# Allegro board GSM_Module_REV3.0.brd
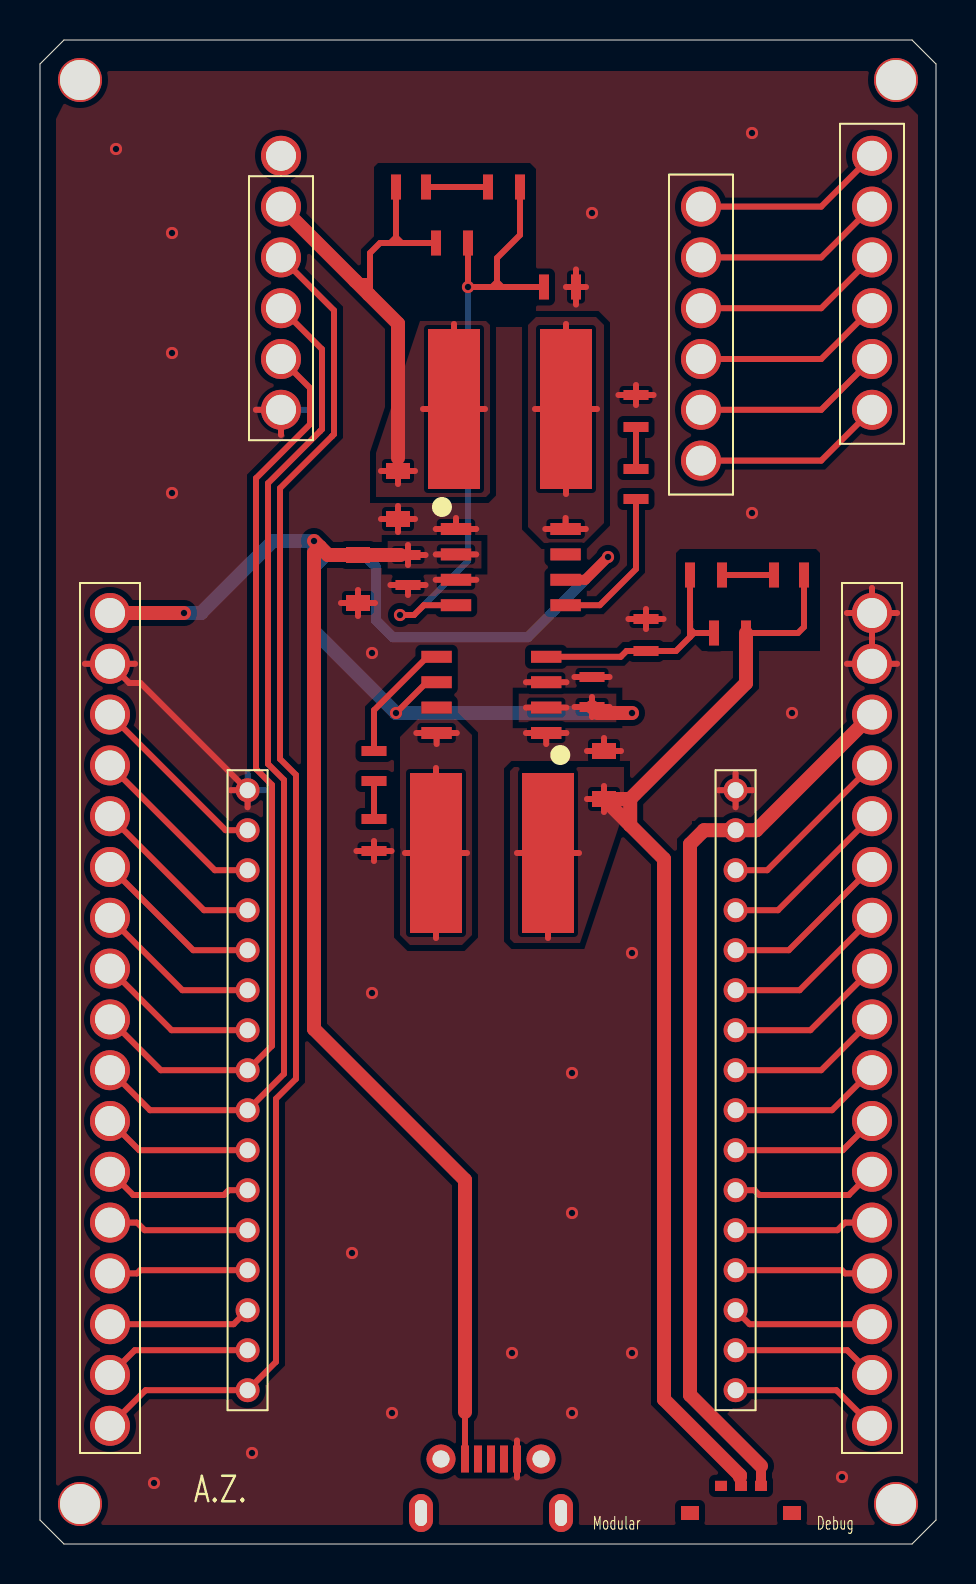
[diagram p0: board, top side]
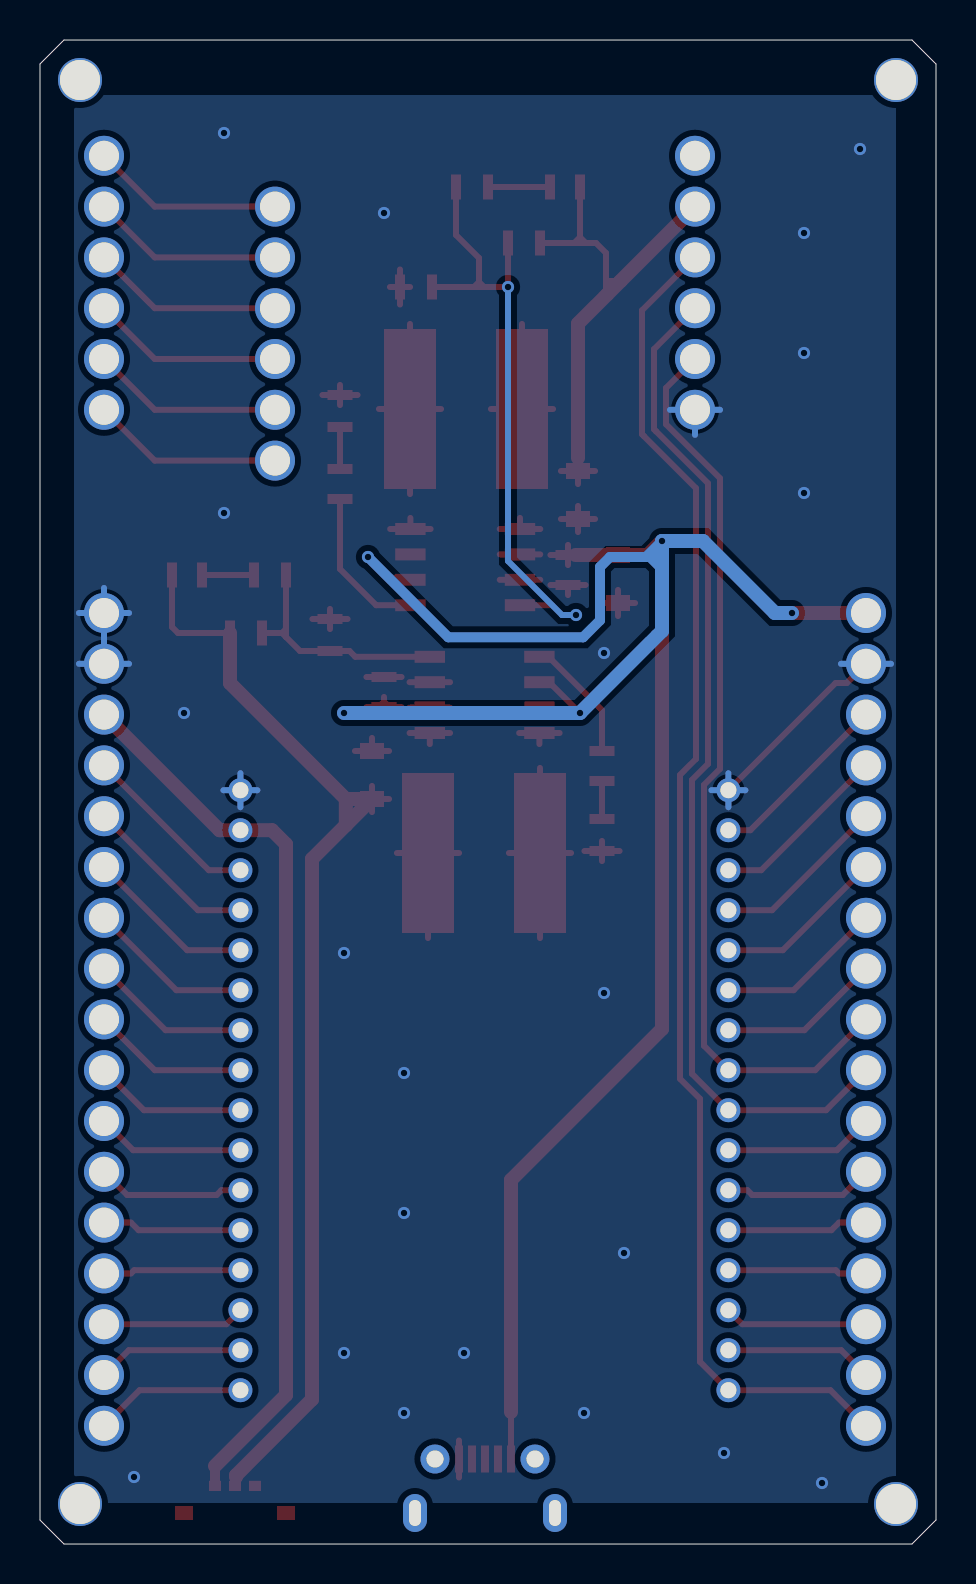
[diagram p1: board, bottom side, seen from below]

Outline 44.8 x 75.2 mm; copper layers: TOP, BOTTOM. Coordinates in mm from the lower left corner of the outline.
Outline path: 0,74 1.2,75.2 43.6,75.2 44.8,74 44.8,1.2 43.6,0 1.2,0 0,1.2 0,74

## Design rules (mm)
constraint set DEFAULT: min track width 0.3

## Placement (name value [footprint] x y rotation side)
1  HEADER  [HEADER17]  3.5 46.55 270 top
CBY1  0.01 uF  [C_0805]  26.1 43.35 270 top
CBY2  0.01 uF  [C_0805]  19.9 47.95 90 top
CC1  12 nF  [C_0805]  18.2 38.15 90 top
CC2  9 nF  [C_0805]  28.3 53.75 270 top
CF1  430 pF  [C_0805]  38.2 49.95 180 top
CF2  430 pF  [C_0805]  17.8 66.35 0 top
CIN  22 uF  [C_3216]  15.9 47.05 90 top
COUT1  44 uF  [C_3216]  28.2 39.65 270 top
COUT2  44 uF  [C_3216]  17.9 51.25 90 top
L1  3.6 uH  [L_8040]  19.8 34.55 0 top
L2  3.6 uH  [L_8040]  26.3 56.75 180 top
NOREF  -  [unnamed]  42.8 2 0 top
NOREF#2  -  [unnamed]  42.8 73.2 0 top
NOREF#3  -  [unnamed]  2 73.2 0 top
NOREF#4  -  [unnamed]  2 2 0 top
R1  24.31 K  [R_0805]  33.7 45.55 0 top
R2  7.78 K  [R_0805]  30.3 46.25 270 top
R3  31.12 K  [R_0805]  21.4 65.05 180 top
R4  7.78 K  [R_0805]  26.8 62.85 180 top
RC1  18.7 K  [R_0805]  16.7 34.65 90 top
RC2  143 K  [R_0805]  29.8 57.45 270 top
RF1  1K  [R_0805]  34.1 48.45 180 top
RF2  1K  [R_0805]  22.4 67.85 0 top
S1  -  [SWITCH]  32.5 1.55 0 top
U6  NCP3170  [SOIC8_FOOTPRINT]  19.81 40.55 90 top
U9  NCP3170  [SOIC8_FOOTPRINT]  26.3 50.75 270 top
U11  ONION  [OMEGA2_FOOTPRINT]  34.78 -1.71 270 top
U15  SIM800L  [SIM800_COREBOARD_FOOTPRINT]  33.05 66.87 270 top
U16  HEADER  [HEADER6]  41.6 69.41 270 top
U17  HEADER  [HEADER17]  41.6 46.55 270 top
U18  USB  [MICRO_USB]  19.05 1.55 0 top

## Library data of the parts
1 = BUS_17_PIN_L
CBY1 CBY2 CC1 CC2 CF1 CF2 CIN COUT1 COUT2 = C
L1 L2 = L
R1-R4 RC1 RC2 RF1 RF2 = R
S1 = SWITCH
U6 U9 = NCP3170_0
U11 = ONION
U15 = SIM800L
U16 = BUS_6_PIN_R
U17 = BUS_17_PIN_R
U18 = USB_5_PIN_0

## Footprints (pads in the part's own frame, mm; a bottom-side part is the same pattern mirrored in y, then rotated)
C_0805
  rect 0.5x1.25 smd: 1(0,1.5) 2(1.5,1.5)
C_3216
  rect 0.8x1.2 smd: 1(0,0) 2(2.4,0)
HEADER6
  round 2 hole 1.5: 1(0,0) 2(2.54,0) 3(5.08,0) 4(7.62,0) 5(10.16,0) 6(12.7,0)
HEADER17
  round 2 hole 1.5: 1(0,0) 2(2.54,0) 3(5.08,0) 4(7.62,0) 5(10.16,0) 6(12.7,0) 7(15.24,0) 8(17.78,0) 9(20.32,0) 10(22.86,0) 11(25.4,0) 12(27.94,0) 13(30.48,0) 14(33.02,0) 15(35.56,0) 16(38.1,0) 17(40.64,0)
L_8040
  rect 2.6x8 smd: 1(0,0) 2(5.6,0)
MICRO_USB
  rect 0.4x1.35 smd: 1(2.2,2.7) 2(2.85,2.7) 3(3.5,2.7) 4(4.15,2.7) 5(4.8,2.7)
  round 1.45 hole 0.85: 6(1,2.7) 7(6,2.7)
  oval 1.2x1.9 hole 0.6x1.3: 8(0,0) 9(7,0)
OMEGA2_FOOTPRINT
  round 1.2 hole 0.8: 1(-39.4,-24.4) 2(-37.4,-24.4) 3(-35.4,-24.4) 4(-33.4,-24.4) 5(-31.4,-24.4) 6(-29.4,-24.4) 7(-27.4,-24.4) 8(-25.4,-24.4) 9(-23.4,-24.4) 10(-21.4,-24.4) 11(-19.4,-24.4) 12(-17.4,-24.4) 13(-15.4,-24.4) 14(-13.4,-24.4) 15(-11.4,-24.4) 16(-9.4,-24.4) 17(-39.4,0) 18(-37.4,0) 19(-35.4,0) 20(-33.4,0) 21(-31.4,0) 22(-29.4,0) 23(-27.4,0) 24(-25.4,0) 25(-23.4,0) 26(-21.4,0) 27(-19.4,0) 28(-17.4,0) 29(-15.4,0) 30(-13.4,0) 31(-11.4,0) 32(-9.4,0)
R_0805
  rect 0.5x1.25 smd: 1(0,0) 2(1.6,0)
SIM800_COREBOARD_FOOTPRINT
  round 2 hole 1.5: 1(0,0) 2(2.54,0) 3(5.08,0) 4(7.62,0) 5(10.16,0) 6(12.7,0) 7(0,-21) 8(2.54,-21) 9(5.08,-21) 10(7.62,-21) 11(10.16,-21) 12(-2.54,-21)
SOIC8_FOOTPRINT
  rect 0.6x1.52 smd: 1(0,-5.5) 2(1.27,-5.5) 3(2.54,-5.5) 4(3.81,-5.5) 5(0,-0.02) 6(1.27,-0.02) 7(2.54,-0.02) 8(3.81,-0.02)
SWITCH
  rect 0.6x0.51 smd: 1(1.55,1.355) 2(2.55,1.355) 3(3.55,1.355)
  rect 0.9x0.7 smd: 4(0,0) 5(5.1,0)
unnamed
  round 2.2 hole 2: 1(0,0)

## Nets
VDD_ONION: S1.3(VDD3.3V) U11.18 U17.3(VDD3.3)
0: 1.2 CBY1.1 CBY2.1 CIN.1 COUT1.1 COUT2.1 R2.1 R4.1 RC1.1 RC2.1 U6.1 U6.3 U9.1 U9.3 U11.1 U11.17 U15.11 U17.1 U17.2 U18.5
N00605: 1.1(VDD5) CBY1.2 CBY2.2 CIN.2 U6.2 U6.7 U9.2 U9.7 U18.1(VDD5)
N00624: U11.19 U17.4
N00636: U11.20 U17.5
N00648: U11.21 U17.6
N00660: U11.22 U17.7
N00672: U11.23(WDT_R_G38) U17.8
N00684: U11.24 U17.9
N00696: U11.25 U17.10
N00708: U11.26 U17.11
N00720: U11.27 U17.12
N00732: U11.28 U17.13
N00744: U11.29 U17.14
N00756: U11.30 U17.15
N00772: U11.31 U17.16
N00784: U11.32 U17.17
N01017: 1.4 U11.3
N01019: 1.5 U11.4
N01021: 1.6 U11.5
N01023: 1.7 U11.6
N01025: 1.8 U11.7
N01027: 1.9 U11.8 U15.10
N01029: 1.10 U11.9 U15.9
N01031: 1.11 U11.10
N01033: 1.12 U11.11
N01035: 1.13 U11.12
N01037: 1.14 U11.13
N01039: 1.15 U11.14
N01041: 1.16 U11.15
N01043: 1.17 U11.16 U15.8
N02446: 1.3 U11.2
N05374: CF1.1 COUT1.2 L1.2 R1.2 S1.2
N05658: R1.1 R2.2 RF1.2 U6.4
N07946: CF2.1 COUT2.2 L2.2 R3.2 U15.7(VCC)
N17197: R3.1 R4.2 RF2.2 U9.4
N18925: CF1.2 RF1.1
N19734: CC1.2 U6.8
N37284: L2.1 U9.5(VSW)
N038044: L1.1 U6.5(VSW)
N047600: CC1.1 RC1.2
N081480: CC2.1 RC2.2
N081481: CC2.2 U9.8
N184661: CF2.2 RF2.1
N261676: U15.1 U16.1
N261677: U15.2 U16.2
N261678: U15.3 U16.3
N261679: U15.4 U16.4
N2616710: U15.5 U16.5(SPKP)
N2616711: U15.6 U16.6

Pads without a net: NOREF 1; NOREF#2 1; NOREF#3 1; NOREF#4 1; S1 1 4 5; U6 6; U9 6; U15 12; U18 2 3 4 6 7 8 9

## Via types
v1: diameter 0.61, hole 0.33, TOP to BOTTOM, 28 vias

## Routing (per net, layer and track width the routed paths; a pad name or vN(x,y) marks a point on that pad's centre or on a via; arc(x,y) is an arc through that point)
VDD_ONION: length 45.3
  TOP w0.5: 36.05,3.9 S1.3
  TOP w0.7: U17.3 35.82,35.69 U11.18 33.2,35.69 32.5,34.99 32.5,7.45 36.05,3.9
0: length 84.6
  TOP w0.3: COUT2.1 18.75,51.25 ; COUT2.1 17.9,50.6 ; COUT2.1 17.05,51.25 ; COUT2.1 17.9,51.9 ; 23.85,3.32 U18.5 23.85,5.18 ; 29.8,56.95 RC2.1 ; RC2.1 30.68,57.45 ; RC2.1 28.92,57.45 ; RC2.1 29.8,57.95 ; R4.1 27.3,62.85 ; R4.1 26.8,63.73 ; R4.1 26.3,62.85 ; R4.1 26.8,61.97 ; 15.05,47.05 CIN.1 ; CIN.1 15.9,47.7 ; CIN.1 15.9,46.4 ; CIN.1 16.75,47.05 ; 40.35,44.01 U17.2 ; U17.2 41.6,45.26 ; U17.2 42.85,44.01 ; 26.72,43.35 CBY1.1 28.48,43.35 ; U11.17 35.63,37.69 ; U11.17 34.78,38.54 ; U11.17 34.78,36.84 ; U11.17 33.93,37.69 ; 1.2 4.46,43.05 5.02,43.05 U11.1 ; 1.2 4.75,44.01 ; 1.2 2.25,44.01 ; 19.79,50.75 U9.1 ; U9.1 21.81,50.75 ; U9.1 20.8,51.3 ; 9.53,37.69 U11.1 ; U11.1 10.38,36.84 ; COUT1.1 29.05,39.65 ; COUT1.1 28.2,40.3 ; COUT1.1 27.35,39.65 ; U6.1 26.32,40.55 ; U6.1 25.31,40 ; U6.1 24.3,40.55 ; 29.42,46.25 R2.1 ; R2.1 30.3,46.75 ; R2.1 31.18,46.25 ; R2.1 30.3,45.75 ; 17.52,47.95 CBY2.1 ; CBY2.1 19.28,47.95 ; CBY2.1 18.4,47.45 ; 21.81,48.21 U9.3 19.79,48.21 ; 10.8,56.71 U15.11 12.05,55.46 ; U17.1 41.6,47.8 ; U17.1 42.85,46.55 ; U17.1 40.35,46.55 ; U17.1 41.6,45.3 ; 15.82,34.65 RC1.1 ; RC1.1 17.58,34.65 ; RC1.1 16.7,34.15 ; RC1.1 16.7,35.15 ; 24.3,43.09 U6.3 26.32,43.09
  BOTTOM w0.3: 4.75,44.01 1.2 2.25,44.01 ; U17.2 42.85,44.01 ; U17.2 41.6,45.26 ; U17.2 40.35,44.01 ; U17.1 41.6,47.8 ; U17.1 41.6,45.3 ; U17.1 42.85,46.55 ; U17.1 40.35,46.55 ; U15.11 13.3,56.71 ; U15.11 10.8,56.71 ; U15.11 12.05,55.46 ; 33.93,37.69 U11.17 ; U11.17 35.63,37.69 ; U11.17 34.78,36.84 ; U11.17 34.78,38.54 ; U11.1 10.38,38.54 ; U11.1 9.53,37.69 ; U11.1 10.38,36.84 ; U11.1 11.23,37.69
  vias: v1(3.8,69.75) v1(5.7,3.05) v1(6.6,65.55) v1(6.6,59.55) v1(6.6,52.55) v1(10.6,4.55) v1(15.6,14.55) v1(16.6,44.55) v1(16.6,27.55) v1(17.6,6.55) v1(23.6,9.55) v1(26.6,23.55) v1(26.6,16.55) v1(26.6,6.55) v1(27.6,66.55) v1(29.6,29.55) v1(29.6,9.55) v1(35.6,70.55) v1(35.6,51.55) v1(37.6,41.55) v1(40.1,3.35)
N00605: length 124.7
  TOP w0.3: CBY2.2 18.4,49.95 ; CBY2.2 19.28,49.45 ; CBY2.2 18.02,49.45 ; CBY2.2 18.4,48.95 ; 24.3,41.82 U6.2 26.32,41.82 ; v1(17.8,41.55) 19.34,43.09 U6.7 ; 21.81,49.48 U9.2 19.79,49.48 ; CBY1.2 27.6,42.35 ; CBY1.2 28.48,41.85 ; CBY1.2 27.6,41.35 ; CBY1.2 26.72,41.85 ; 21.25,6.6 U18.1
  TOP w0.5: U9.7 27.26,48.21 v1(28.4,49.35)
  TOP w0.7: 14,49.85 14.4,49.45 CIN.2 18.02,49.45 ; 14,49.85 13.7,49.55 13.7,25.75 21.25,18.2 21.25,6.6 ; 14,49.85 v1(13.7,50.15) ; v1(29.6,41.55) 27.9,41.55 CBY1.2 ; v1(7.2,46.55) 1.1
  BOTTOM w0.5: 13.7,48.75 14.3,49.35 14.5,49.35 ; 14.5,49.35 16.3,49.35 16.8,48.85 16.8,46.18 17.65,45.34 24.39,45.34 v1(28.4,49.35) ; 14.5,49.35 v1(13.7,50.15)
  BOTTOM w0.7: v1(7.2,46.55) 8.05,46.55 11.65,50.15 v1(13.7,50.15) 13.7,45.65 v1(17.8,41.55) v1(29.6,41.55)
N00624: length 9
  TOP w0.3: U11.19 36.36,33.69 U17.4
N00636: length 8.8
  TOP w0.3: U17.5 36.9,31.69 U11.20
N00648: length 8.5
  TOP w0.3: U11.21 37.44,29.69 U17.6
N00660: length 8.3
  TOP w0.3: U17.7 37.98,27.69 U11.22
N00672: length 8.1
  TOP w0.3: U11.23 38.52,25.69 U17.8
N00684: length 7.9
  TOP w0.3: U17.9 39.06,23.69 U11.24
N00696: length 7.6
  TOP w0.3: U17.10 39.6,21.69 U11.25
N00708: length 7.4
  TOP w0.3: U11.26 40.14,19.69 U17.11
N00720: length 7.4
  TOP w0.3: U17.12 40.44,17.45 35.97,17.45 35.73,17.69 U11.27
N00732: length 7
  TOP w0.3: U17.13 40.25,16.07 39.87,15.69 U11.28
N00744: length 6.9
  TOP w0.3: U17.14 40.25,13.53 40.09,13.69 U11.29
N00756: length 7.1
  TOP w0.3: U11.30 35.48,10.99 U17.15
N00772: length 7.3
  TOP w0.3: U17.16 40.36,9.69 U11.31
N00784: length 7.6
  TOP w0.3: U11.32 39.82,7.69 U17.17
N01017: length 9.1
  TOP w0.3: U11.3 8.74,33.69 1.4
N01019: length 8.8
  TOP w0.3: U11.4 8.2,31.69 1.5
N01021: length 8.6
  TOP w0.3: 1.6 7.66,29.69 U11.5
N01023: length 8.4
  TOP w0.3: 1.7 7.12,27.69 U11.6
N01025: length 8.2
  TOP w0.3: 1.8 6.58,25.69 U11.7
N01027: length 46
  TOP w0.3: U15.10 13.5,57.8 13.5,55.99 10.8,53.29 10.8,38.76 11.6,37.95 11.6,24.91 U11.8 6.04,23.69 1.9
N01029: length 50.9
  TOP w0.3: U15.9 14.1,59.74 14.1,55.74 14,55.64 11.4,53.04 11.4,39 12.2,38.2 12.2,23.51 U11.9 5.5,21.69 1.10
N01031: length 7.5
  TOP w0.3: U11.10 4.96,19.69 1.11
N01033: length 7.5
  TOP w0.3: U11.11 9.43,17.69 9.19,17.45 4.66,17.45 1.12
N01035: length 7
  TOP w0.3: 1.13 4.85,16.07 5.23,15.69 U11.12
N01037: length 6.9
  TOP w0.3: U11.13 5.01,13.69 4.85,13.53 1.14
N01039: length 7.2
  TOP w0.3: 1.15 9.68,10.99 U11.14
N01041: length 7.4
  TOP w0.3: 1.16 4.74,9.69 U11.15
N01043: length 67.8
  TOP w0.3: U15.8 14.7,61.68 14.7,55.49 14.6,55.39 12,52.79 12,39.25 12.8,38.45 12.8,23.26 11.8,22.26 11.8,9.11 U11.16 5.28,7.69 1.17
N02446: length 9.3
  TOP w0.3: 1.3 9.28,35.69 U11.2
N05374: length 65.6
  TOP w0.3: COUT1.2 28.2,37.9 ; COUT1.2 27.35,37.25 ; COUT1.2 28.2,36.6 ; CF1.1 38.2,45.85 37.9,45.55 R1.2 ; 23.85,34.55 L1.2 ; L1.2 26.95,34.55 ; L1.2 25.4,30.3
  TOP w0.5: 35,3.35 35.05,3.3 S1.2
  TOP w0.7: 29.51,35.94 COUT1.2 29.51,37.25 ; 29.51,35.94 31.2,34.25 31.2,7.23 35,3.43 35,3.35 ; 29.51,35.94 29.51,37.25 ; 29.51,37.25 35.3,43.04 R1.2
N05658: length 12.7
  TOP w0.3: 32.5,45.35 31.8,44.65 R2.2 29.32,44.65 29.03,44.36 U6.4 ; 32.5,45.35 32.5,46.15 ; 32.5,45.35 32.7,45.55 ; 32.5,46.15 RF1.2 ; 32.5,46.15 32.5,46.15 32.5,45.75 32.7,45.55 ; 32.7,45.55 R1.1
N07946: length 35.1
  TOP w0.3: COUT2.2 18.75,53.65 ; COUT2.2 17.05,53.65 ; COUT2.2 17.9,53 ; 17.8,65.34 18.09,65.05 18.09,65.05 18.22,65.05 ; 17.8,65.34 CF2.1 ; 17.8,65.34 17.51,65.05 ; 18.22,65.05 R3.2 ; 18.22,65.05 17.51,65.05 ; L2.2 22.25,56.75 ; L2.2 20.7,61 ; L2.2 19.15,56.75 ; 16.5,63.15 16.5,62.55 16.43,62.49 ; 16.5,63.15 15.77,63.15 ; 16.5,63.15 16.5,64.55 17,65.05 17.51,65.05
  TOP w0.5: COUT2.2 17.9,54.3
  TOP w0.7: U15.7 17.9,61.02 17.9,54.3
N17197: length 33.2
  TOP w0.3: R3.1 v1(21.4,62.85) 22.6,62.85 ; 22.85,63.1 22.6,62.85 ; 22.85,63.1 22.85,64.3 24,65.45 RF2.2 ; 22.85,63.1 23.1,62.85 ; 22.6,62.85 23.1,62.85 ; U9.4 19.19,46.94 18.7,46.45 v1(18,46.45) ; 23.1,62.85 R4.2
  BOTTOM w0.3: v1(18,46.45) 18.7,46.45 21.4,49.15 v1(21.4,62.85)
N18925: length 2.6
  TOP w0.3: RF1.1 CF1.2
N19734: length 6.3
  TOP w0.3: CC1.2 16.7,41.69 19.37,44.36 U6.8
N37284: length 14.2
  TOP w0.3: U9.5 26.28,51.3 ; U9.5 25.27,50.75 ; U9.5 27.29,50.75 ; L2.1 27.85,56.75 ; L2.1 26.3,52.5 ; L2.1 26.3,61 ; L2.1 24.75,56.75
N038044: length 14.2
  TOP w0.3: L1.1 21.35,34.55 ; L1.1 19.8,38.8 ; L1.1 18.25,34.55 ; L1.1 19.8,30.3 ; U6.5 20.84,40.55 ; U6.5 19.83,40 ; U6.5 18.82,40.55
N047600: length 1.9
  TOP w0.3: CC1.1 RC1.2
N081480: length 2.1
  TOP w0.3: CC2.1 RC2.2
N081481: length 7.8
  TOP w0.3: CC2.2 29.8,48.75 27.99,46.94 U9.8
N184661: length 3.1
  TOP w0.3: CF2.2 RF2.1
N261676: length 9.6
  TOP w0.3: U15.1 39.06,66.87 U16.1
N261677: length 9.6
  TOP w0.3: U16.2 39.06,64.33 U15.2
N261678: length 9.6
  TOP w0.3: U15.3 39.06,61.79 U16.3
N261679: length 9.6
  TOP w0.3: U16.4 39.06,59.25 U15.4
N2616710: length 9.6
  TOP w0.3: U15.5 39.06,56.71 U16.5
N2616711: length 9.6
  TOP w0.3: U16.6 39.06,54.17 U15.6

## Copper pours and planes (outline as drawn; the poured copper is in the pictures)
0 on TOP: 41.7,73.65 43.9,71.45 43.9,1.55 42.63,0.95 1.9,0.95 0.8,2.05 0.8,71.25 2,73.65 ; 9 cut-outs
0 on BOTTOM: 2,72.45 2,2.05 43.1,2.05 43.1,72.45
N00605 on TOP: 23.94,42.52 23.94,41.09 28.82,41.09 28.82,42.52
N00605 on TOP: 17.39,50.15 17.39,48.77 22.07,48.77 22.07,50.15
N05374 on TOP: 29.2,36.65 29.2,38.85 23.7,38.85 23.5,38.65 23.5,30.25 23.7,30.05 27,30.05
N07946 on TOP: 16.8,54.55 16.8,52.35 22.3,52.35 22.5,52.55 22.5,60.95 22.3,61.15 19,61.15
N37284 on TOP: 27.2,50.05 25.2,50.05 24.4,50.85 24.4,60.95 24.8,61.35 27.8,61.35 28.2,60.95 28.2,51.05
N038044 on TOP: 18.9,41.25 20.8,41.25 21.6,40.45 21.6,30.45 21.1,29.95 18.5,29.95 18,30.45 18,40.35

## Text on the board
Ref Des/Silkscreen Top: Modular | Debug | A.Z.
COMPVAL_TYPE_TOP: RING | MICP | MICN | DTR
